# Altium PCB PCB.PcbDoc
Units mm, origin at the board's own origin, x right, y up, seen from the top; angles counter-clockwise.
Board outline 80 x 80 mm, 2 copper layers (Top Layer, Bottom Layer); 23 components, 27 nets, 83 pads, 0 vias.
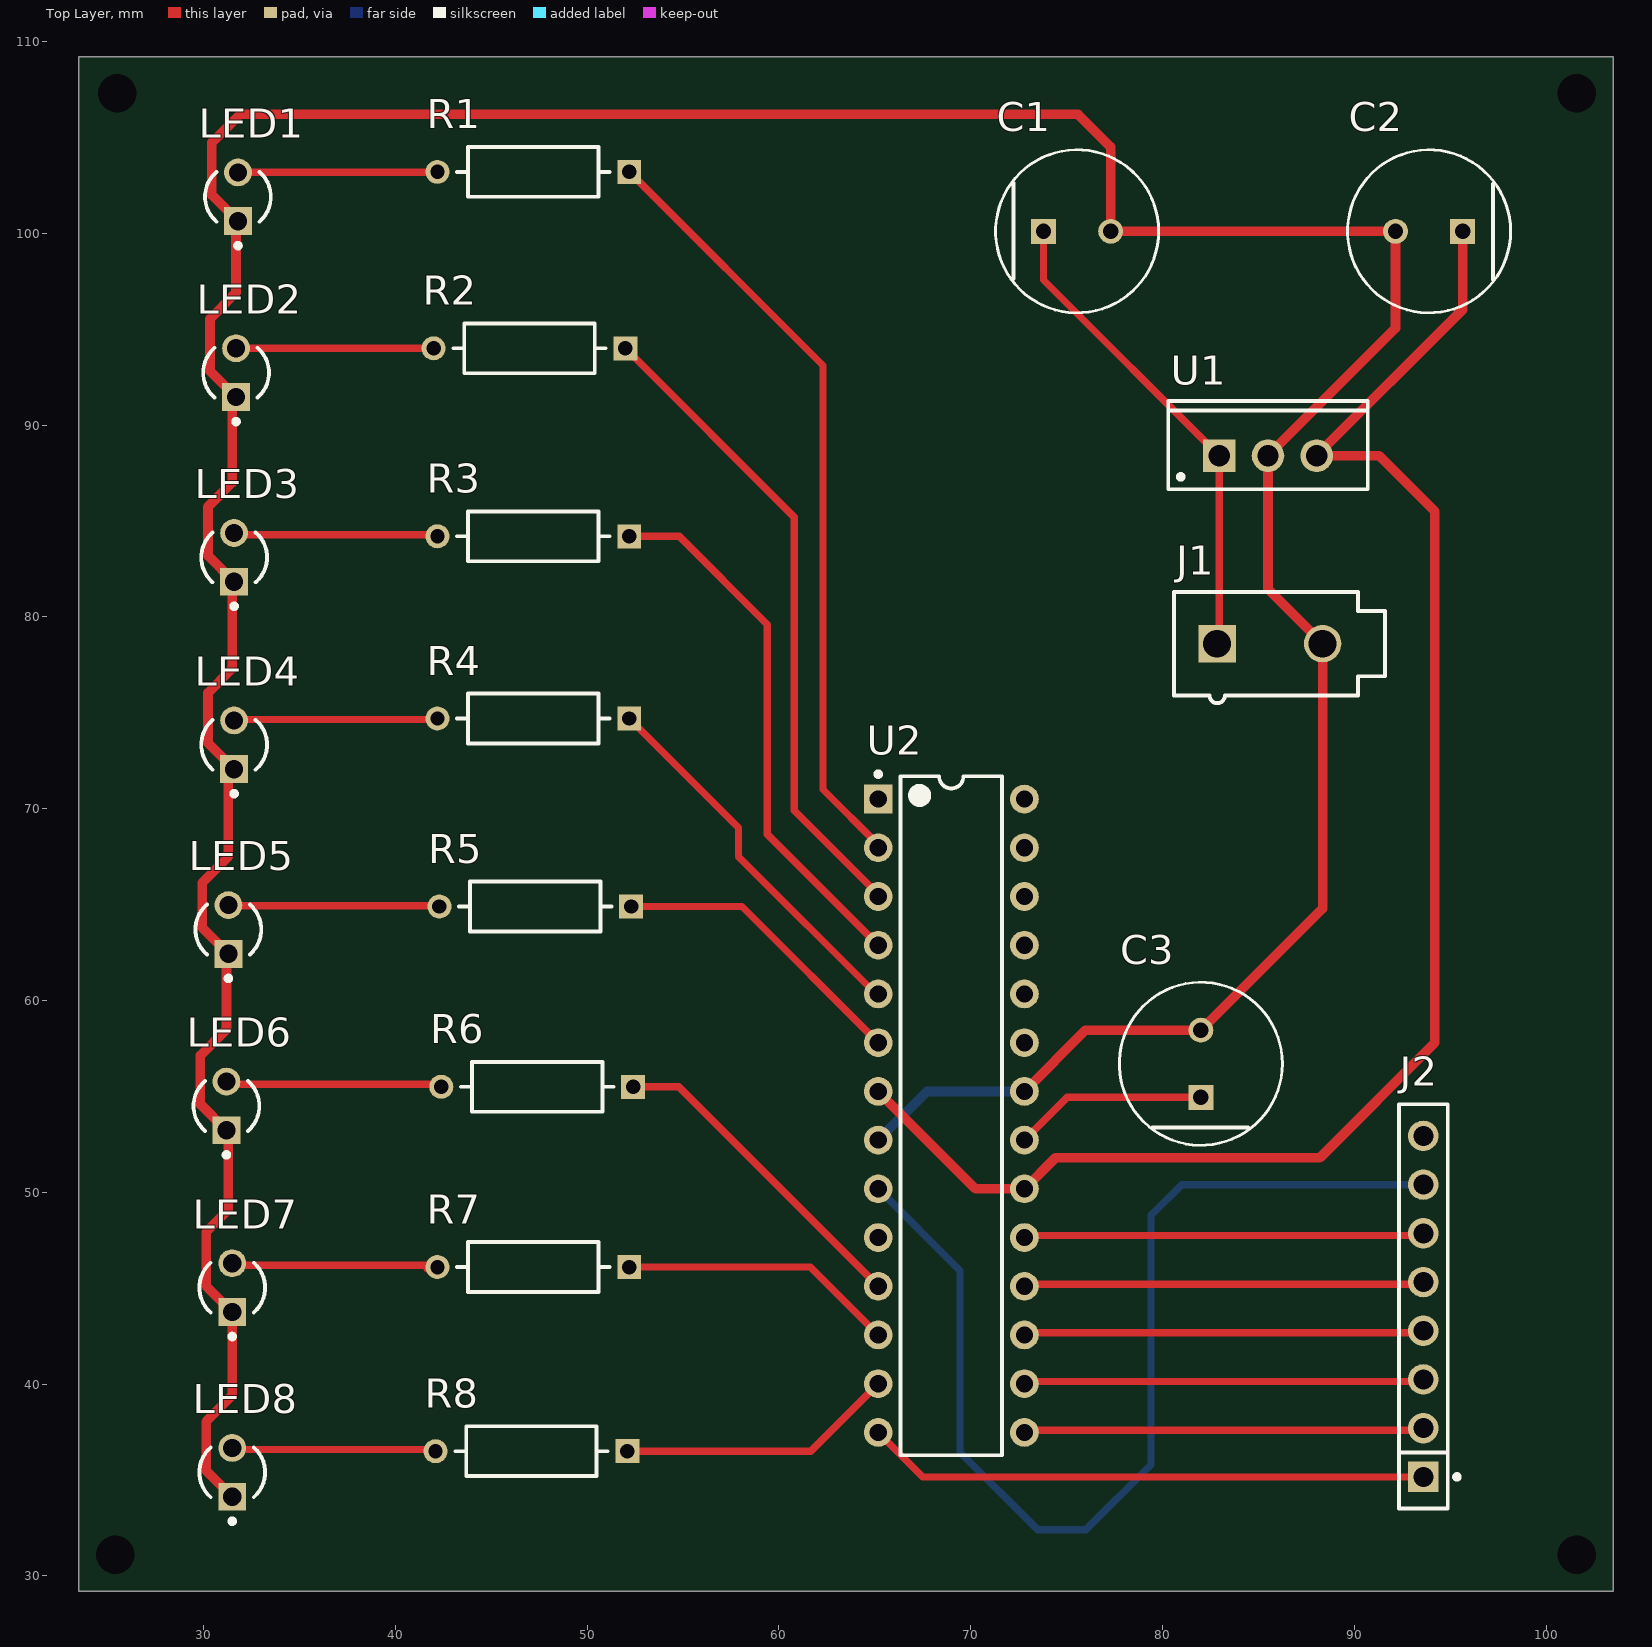
[diagram p0: Top Layer view]
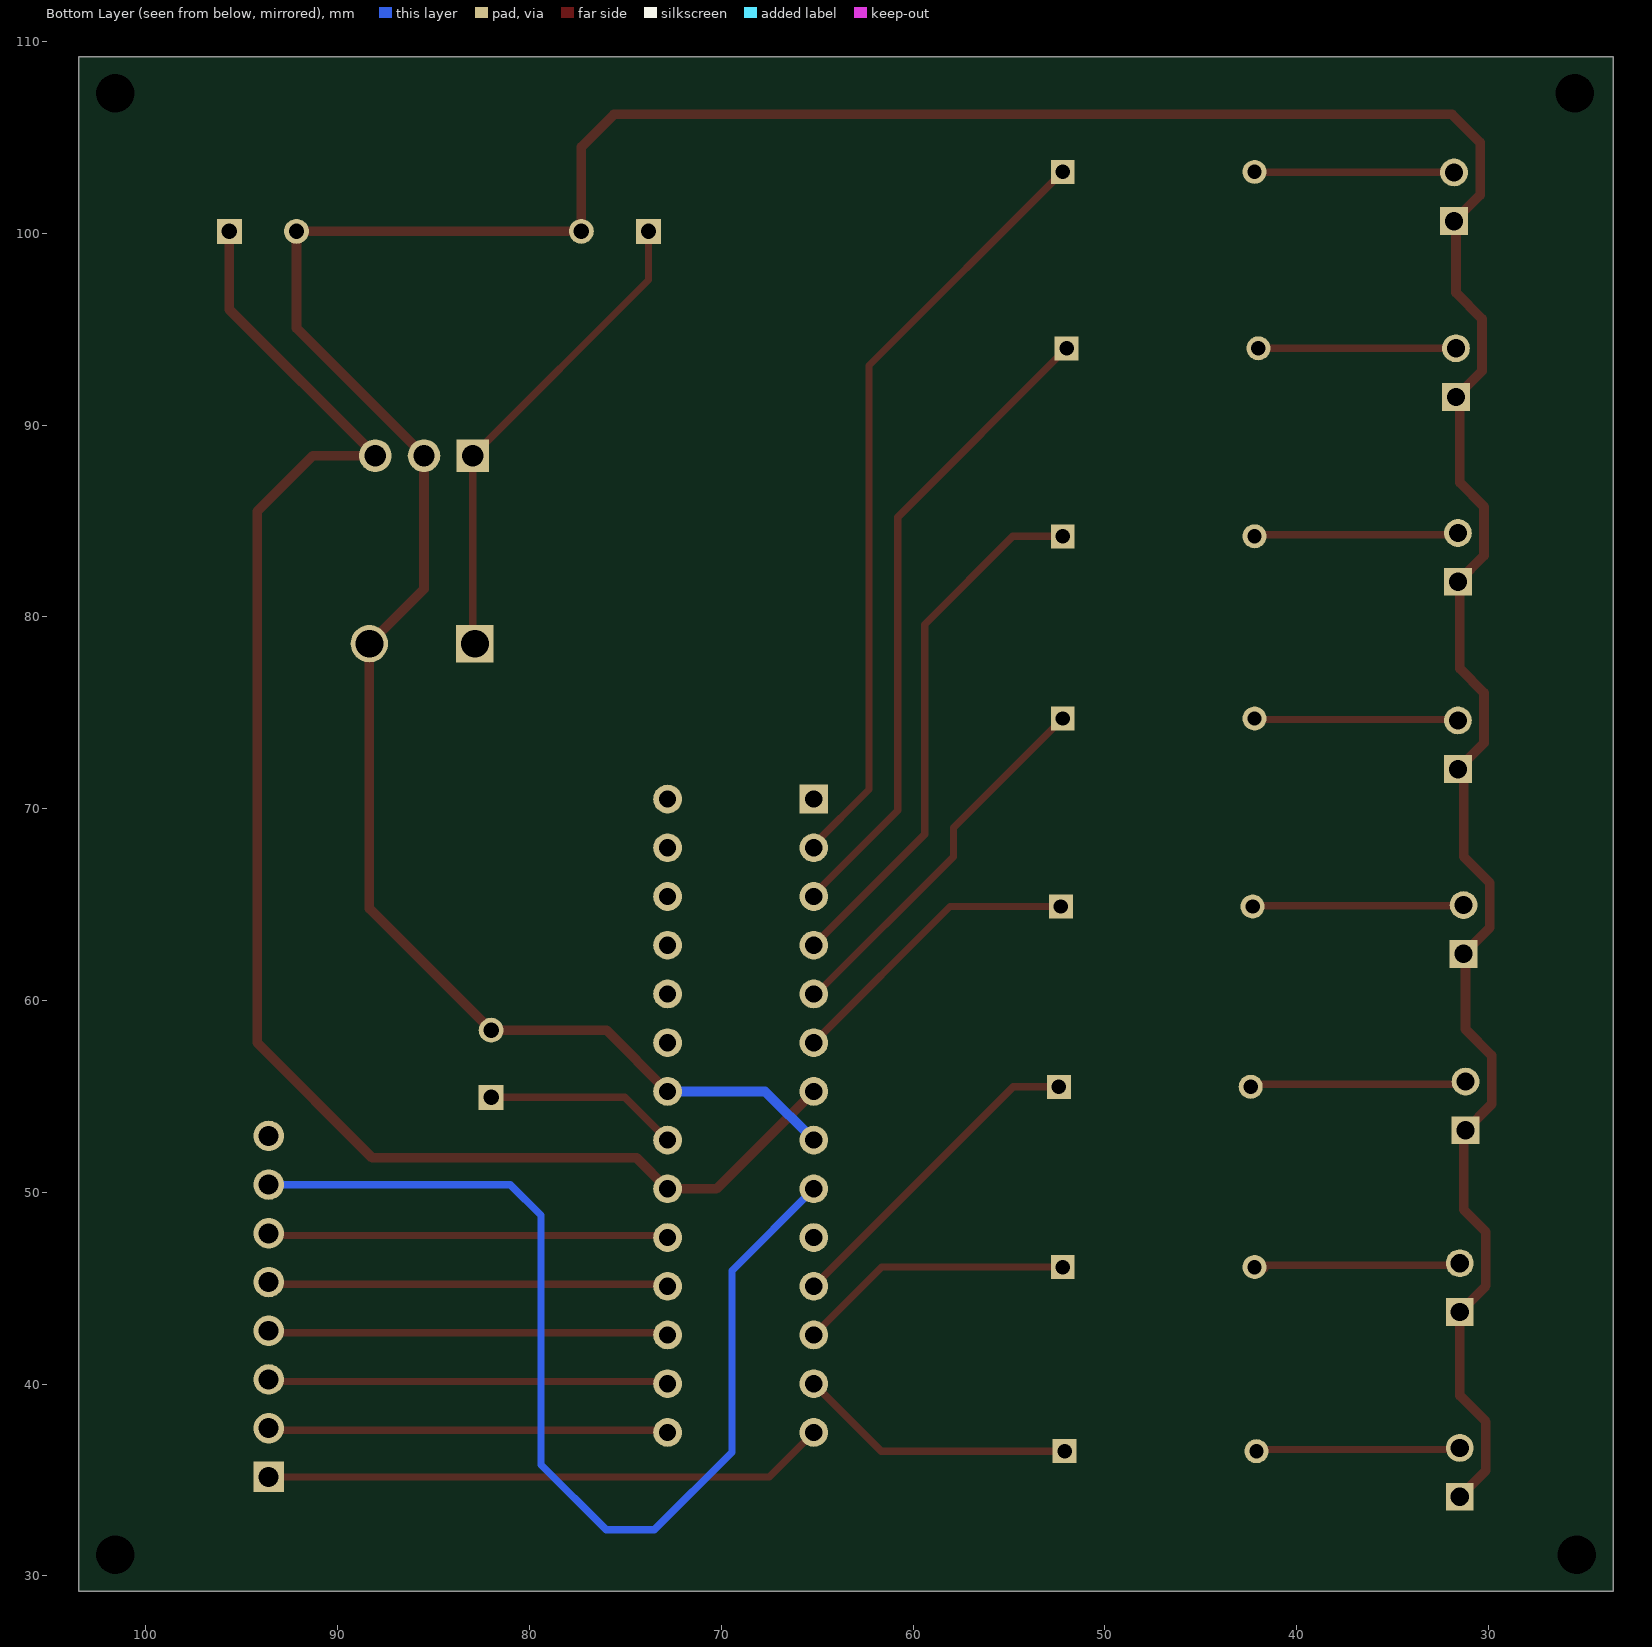
[diagram p1: Bottom Layer view, seen from below]
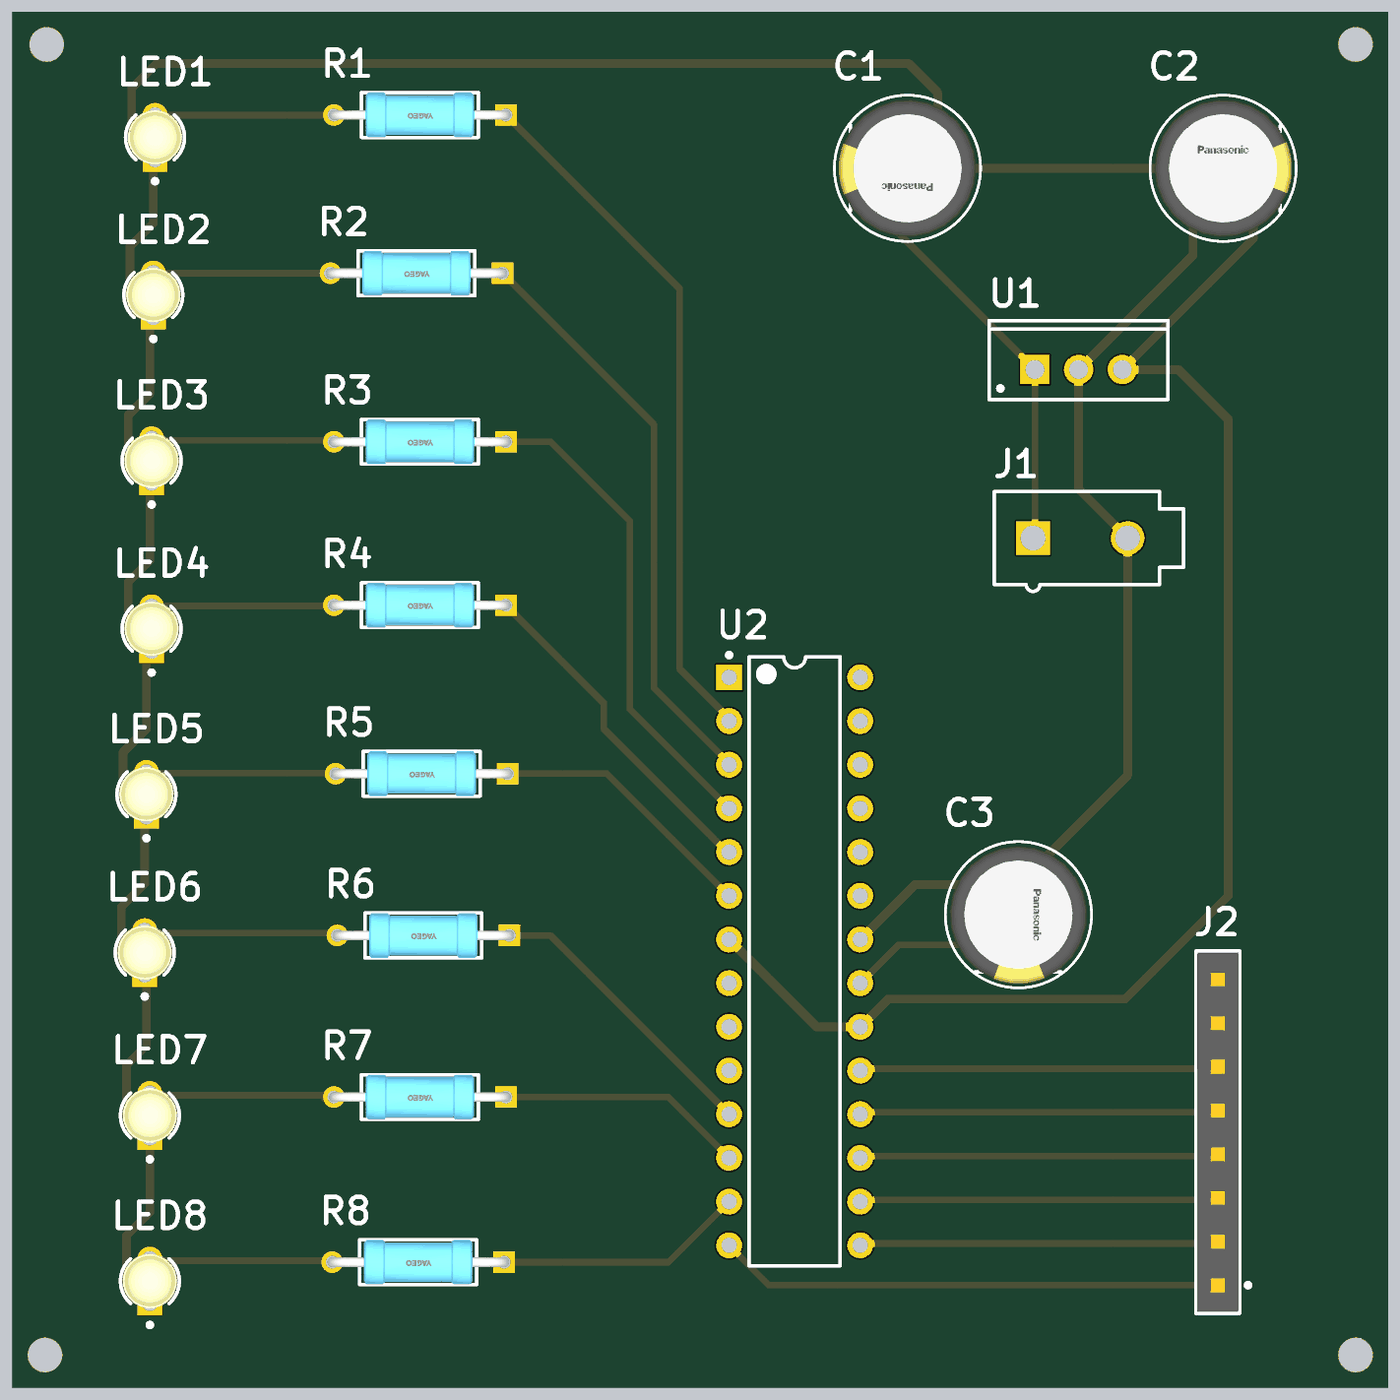
[diagram p2: 3D render of the assembled board from above, using the file's embedded part models]

## Layer stack, top to bottom
Top Solder: solder mask 0.0102, Solder Resist, Dk 3.5
Top Layer: signal copper 0.0356
Dielectric 1: dielectric 0.32, FR-4, Dk 4.8
Bottom Layer: signal copper 0.0356
Bottom Solder: solder mask 0.0102, Solder Resist, Dk 3.5

## Board outline
23.5,29.2 103.5,29.2 103.5,109.2 23.5,109.2

## Design rules (kind name [scope] priority, off if disabled: settings)
Clearance [All] p1: gap=0.381 ignorepadtopadclearanceinfootprint=FALSE except(0.508: Arc-Hole Track-Hole SMDPad-Hole THPad-Hole Via-Hole Fill-Hole Poly-Hole Region-Hole Text-Hole)
PolygonConnect [All] p1: connectstyle=Relief reliefconductorwidth=0.254 reliefentries=4 polygonreliefangle="90 Angle" airgapwidth=0.254
RoutingVias [All] p1: holewidth=0.711 width=1.27 viastyle="Through Hole" minholewidth=0.711 minwidth=1.27 maxholewidth=0.711 maxwidth=1.27
SolderMaskExpansion [All] p1: expansion=0.102 istentingtop=FALSE
Width Width_1 [InNet('GND') or InNet('5V')] p1: maxlimit=0.635 minlimit=0.381 preferedwidth=0.508
Width [All] p2: maxlimit=0.508 minlimit=0.254 preferedwidth=0.381
30 further rules are at their usual default settings.

## Components (designator, comment, footprint, x,y, rotation, side; value= is the part's Value field where it differs from the comment)
C1 "300nF" FP-EEU-FC1V221L-MFG 75.55,100.1 r0 top value=220uF
C2 "100nF" FP-EEU-FC1V221L-MFG 93.9,100.1 r180 top value=220uF
C3 "100nF" FP-EEU-FC1V221L-MFG 82,56.7 r90 top value=220uF
J1 "39-28-1023" MOLX-39-28-1023-2_V 85.6,78.6 r90 top
J2 "SSW-108-01-G-S" FP-SSW-108-01-G-S-MFG 93.6,44.05 r90 top
LED1 "HLMP-1719" FP-HLMP-1719-MFG 31.8,101.9 r90 top
LED2 "HLMP-1719" FP-HLMP-1719-MFG 31.7,92.73 r90 top
LED3 "HLMP-1719" FP-HLMP-1719-MFG 31.6,83.1 r90 top
LED4 "HLMP-1719" FP-HLMP-1719-MFG 31.6,73.33 r90 top
LED5 "HLMP-1719" FP-HLMP-1719-MFG 31.3,63.7 r90 top
LED6 "HLMP-1719" FP-HLMP-1719-MFG 31.2,54.5 r90 top
LED7 "HLMP-1719" FP-HLMP-1719-MFG 31.5,45.03 r90 top
LED8 "HLMP-1719" FP-HLMP-1719-MFG 31.5,35.4 r90 top
R1 "330" FP-MFR-25-MFG 47.2,103.2 r180 top value=1.18kΩ
R2 "330" FP-MFR-25-MFG 47,94 r180 top value=1.18kΩ
R3 "330" FP-MFR-25-MFG 47.2,84.2 r180 top value=1.18kΩ
R4 "330" FP-MFR-25-MFG 47.2,74.7 r180 top value=1.18kΩ
R5 "330" FP-MFR-25-MFG 47.3,64.9 r180 top value=1.18kΩ
R6 "330" FP-MFR-25-MFG 47.4,55.5 r180 top value=1.18kΩ
R7 "330" FP-MFR-25-MFG 47.2,46.1 r180 top value=1.18kΩ
R8 "330" FP-MFR-25-MFG 47.1,36.5 r180 top value=1.18kΩ
U1 "L7805CV" TO220 85.5,88.4 r0 top
U2 "ATmega328-PU" 28P3 68.99,53.99 r0 top

## Footprints (in the part's own frame and the unit in brackets; to place one, negate y for a bottom-side part, rotate by r counter-clockwise, add the part's x,y. Pads: shape width x height; smd on the part's side, far side on the other; paste and mask are expansions set on the pad)
28P3 [mm] "28-Pin Plastic Dual In-Line Package (PDIP)"
  rect 1.5x1.5 hole 0.9: 1(-3.81,16.51)
  round 1.5 hole 0.9: 2(-3.81,13.97) 3(-3.81,11.43) 4(-3.81,8.89) 5(-3.81,6.35) 6(-3.81,3.81) 7(-3.81,1.27) 8(-3.81,-1.27) 9(-3.81,-3.81) 10(-3.81,-6.35) 11(-3.81,-8.89) 12(-3.81,-11.43) 13(-3.81,-13.97) 14(-3.81,-16.51) 15(3.81,-16.51) 16(3.81,-13.97) 17(3.81,-11.43) 18(3.81,-8.89) 19(3.81,-6.35) 20(3.81,-3.81) 21(3.81,-1.27) 22(3.81,1.27) 23(3.81,3.81) 24(3.81,6.35) 25(3.81,8.89) 26(3.81,11.43) 27(3.81,13.97) 28(3.81,16.51)
  silkscreen extent -3.93,-17.7 2.65,17.93, body extent -3.6,-17.65 3.6,17.65, height 4.58
FP-EEU-FC1V221L-MFG [mm]
  rect 1.3x1.3 hole 0.8 paste-1000 mask+0: 1(-1.75,0)
  round 1.3 hole 0.8 paste-1000 mask+0: 2(1.75,0)
  silkscreen extent -4.25,-4.25 4.25,4.25, body extent -4.35,-4.35 4.35,4.35, height 0.25
FP-HLMP-1719-MFG [mm]
  rect 1.45x1.45 hole 0.95 paste-1000 mask+0: 1(-1.27,0)
  round 1.45 hole 0.95 paste-1000 mask+0: 2(1.27,0)
  silkscreen extent -2.67,-1.71 1.3,1.71, body extent -2.22,-2.22 2.22,2.22, height 0.25
FP-MFR-25-MFG [mm]
  rect 1.25x1.25 hole 0.75 paste-1000 mask+0: 1(-5,0)
  round 1.25 hole 0.75 paste-1000 mask+0: 2(5,0)
  silkscreen extent -3.98,-1.3 3.98,1.3, body extent -5.72,-1.4 5.72,1.4, height 0.25
FP-SSW-108-01-G-S-MFG [mm]
  rect 1.59x1.59 hole 1.04 paste-1000 mask+0: 1(-8.89,0)
  round 1.59 hole 1.04 paste-1000 mask+0: 2(-6.35,0) 3(-3.81,0) 4(-1.27,0) 5(1.27,0) 6(3.81,0) 7(6.35,0) 8(8.89,0)
  silkscreen extent -10.54,-1.88 10.54,1.27, body extent -10.64,-1.37 10.64,1.37, height 0.25
MOLX-39-28-1023-2_V [mm] "THD, 2-Leads, Body 11x5.8mm"
  rect 1.95x1.95 hole 1.45: 1(0,2.75)
  round 1.95 hole 1.45: 2(0,-2.75)
  silkscreen extent -3.1,-6 2.7,5, body extent -3.1,-6 2.7,5, height 13.6
TO220 [mm] "TO, Thru-Hole, Vertical, Heatsink Mounted; 3 In-Line Leads; Pitch 2.54 mm"
  rect 1.7x1.7 hole 1.1: 1(-2.54,0)
  round 1.7 hole 1.1: 2(0,0) 3(2.54,0)
  silkscreen extent -5.2,-1.75 5.2,2.85, body extent -5.25,-1.8 5.25,2.9, height 19.7

## Part data
C1 C2 C3: library part CMP-05427-000010-1, "CAP ALUM 220UF 20% 35V RADIAL", Capacitance=220uF, Leakage Current=77uA, Manufacturer="Panasonic Electronic Components", Manufacturer Part Number=EEU-FC1V221L, Package=0, Ripple Current=730mA, Temperature="-55°C to +105°C", Temperature Range High=+105°C, Temperature Range Low=-55°C, Tolerance=20%, Voltage Rating=35V, Automotive=Yes, Automotive Grade="Grade 2", Category=Cap, ComponentLink2Description=Datasheet, ComponentLink2URL=https://industrial.panasonic.com/cdbs/www-data/pdf/RDF0000/ABA0000C1209.pdf, Device Class L1="Passive Components", Device Class L2=Capacitors, Device Class L3="Aluminum Electrolytic Capacitors", Digikey Description="CAP ALUM 220UF 20% 35V RADIAL", Dissipation Factor=12%, Esr=0.085Ω, Height=16.5mm, Lead Free=Yes, Life=2000Hours, Material=Aluminum, Mouser Description="Capacitor; Aluminum Electrolytic; Fc Radial Elec Cap 220uF 35V", Octopart=https://octopart.com/eeu-fc1v221l-panasonic-39478519, RoHS=TRUE
J1: library part CMP-2000-05244-1, "Female Header, Pitch 4.2 mm, 1 x 2 Position, Height 12.8 mm, Tail Length 3.5 mm, -40 to 105 degC, RoHS", Colour=Clear, Current Rating=13A, Flammability Rating=UL94V-2, Manufacturer=Molex, Voltage Rating V AC=600V, Working Voltage=250V, Connector Body Material=–, Connector Insert Type=Header, Connector Mounting=PCB, Connector Mounting Orientation=PCB, Connector Type=RectangularPower, Contact Gender=–, Contact Material=Brass, Contact Plating=Tin, Contact Termination=Solder, Datasheet URL=https://datasheet.ciiva.com/11746/0900766b80460d9e-11746456.pdf, Datasheet Version="Rev. F, 05/2004", Gender=Header, Lead Spacing=4.2mm, Manufacturer URL=http://www.molex.com/, Mounting Orientation=Straight, Mounting Type=PCBoard, MSL=–, No. of Contacts=4, No. of Poles=2, No. of Rows=1, No. of Ways=2, Pitch Spacing=4.2mm, Series=Mini-FitJr, SVHC=–, Termination Method=Solder
J2: library part CMP-1272-00001-2, "CONN RCPT 8POS 0.1 GOLD PCB", Color=Black, Contact Resistance=10mR, Current Rating=6.9A, Max Operating Temperature=125°C, Max Voltage Rating (AC)=550V, Min Operating Temperature=-55°C, Connector Type=Socket, Contact Material=Bronze, Contact Plating=Gold, Contact Type="Female Socket", Depth=2.41mm, Gender=Receptacle, Housing Color=Black, Housing Material=Polymer, Lead Free="Lead Free", Length=20.83mm, Mating Cycles=100, Max Current Rating=6.9A, Number of Contacts=8, Number of Positions=8, Number of Rows=1, Orientation=Vertical, Packaging=Bulk, Pitch=2.54mm, Radiation Hardening=No, REACH SVHC="No SVHC", RoHS Compliant=Yes, Series=SSW, Termination=Solder, Voltage Rating=550V
LED1 LED2 LED3 LED4 LED5 LED6 LED7 LED8: library part CMP-2000-06410-2, "LED YELLOW DIFFUSED T-1 T/H", Colour=Yellow, Forward Current=2mA, Forward Voltage=1.8V, Manufacturer=Broadcom, Package=0, Power Dissipation=17.5mW, Reverse Voltage=5V, Temperature="-40°C to +100°C", Temperature Range High=+100°C, Temperature Range Low=-40°C, Automotive=No, Category=Diode, ComponentLink2Description=Datasheet, ComponentLink2URL=https://docs.broadcom.com/docs/AV02-1557EN, Device Class L1=Optoelectronics, Device Class L2=LEDs, Device Class L3=unset, Digikey Description="LED YELLOW DIFFUSED T-1 T/H", Lead Free=Yes, Led Orientation=Straight, Luminous Intensity=2.1mcd, Manufacturer Part Number=HLMP-1719, Mouser Description="Standard LEDs - Through Hole Yellow Diffused 585nm 2.1mcd", Octopart=https://octopart.com/hlmp-1719-broadcom-71130405, RoHS=TRUE, Viewing Angle=50°, Wavelength=585nm
R1 R2 R3 R4 R5 R6 R7 R8: library part CMP-03413-000001-1, "RES 1.18K OHM 1/4W 1% AXIAL", Manufacturer=Yageo, Manufacturer Part Number=MFR-25FBF52-1K18, Package=MFR-25, Power Rating=0.25W, Resistance=1.18kΩ, Temperature="-55°C to +155°C", Temperature Coefficient=100ppm/°C, Temperature Range High=+155°C, Temperature Range Low=-55°C, Tolerance=1%, Voltage Rating=250V, Automotive=No, Category=Res, ComponentLink2Description=Datasheet, ComponentLink2URL=https://www.yageo.com/upload/media/product/products/datasheet/lr/Yageo_LR_MFR_1.pdf, Composition="Metal Film", Device Class L1="Passive Components", Device Class L2=Resistors, Device Class L3="Through-Hole Resistors", Digikey Description="RES 1.18K OHM 1/4W 1% AXIAL", Height=2.6mm, Ipc Land Pattern Name=RESAD1000W75L680D260, Lead Free=Yes, Mouser Description="Metal Film Resistors 1.18K OHM 1/4W 1%", Octopart=https://octopart.com/mfr-25fbf52-1k18-yageo-56251681, RoHS=TRUE, Series=MFR
U1: library part CMP-0244-00483-1, "Positive Voltage Regulator, 5V, 3-Pin TO-220", ComponentLink1Description="Manufacturer URL", ComponentLink1URL=http://www.st.com, ComponentLink2Description=Datasheet, ComponentLink2URL=http://www.st.com/internet/com/TECHNICAL_RESOURCES/TECHNICAL_LITERATURE/DATASHEET/CD00000444.pdf, ComponentLink3Description="Package Specification", ComponentLink3URL=http://www.st.com/internet/com/TECHNICAL_RESOURCES/TECHNICAL_LITERATURE/PACKAGE_INFORMATION/CD00004649.pdf, DatasheetVersion=16/11/2011, PackageDescription="TO, Thru-Hole, Vertical, Heatsink Mounted; 3 In-Line Leads; Pitch 2.54 mm", PackageReference=TO220, PackageVersion=ver3.0
U2: library part CMP-0095-00015-2, "8-bit AVR Microcontroller, 32KB Flash, 1KB EEPROM, 2KB SRAM, 28-pin PDIP, Industrial Grade (-40°C to 85°C)", ComponentLink1Description="Manufacturer URL", ComponentLink1URL=http://www.atmel.com/, ComponentLink2Description="ATmega48A/48PA/88A/88PA/168A/168PA/328/328P Datasheet", ComponentLink2URL=http://www.atmel.com/dyn/resources/prod_documents/8271.pdf, ComponentLink3Description="ATmega48A/48PA/88A/88PA/168A/168PA/328/328P Summary", ComponentLink3URL=http://www.atmel.com/dyn/resources/prod_documents/8271S.pdf, DatasheetVersion="revD, May-2011", PackageDescription="28-lead (0.300\"/7.62mm Wide) Plastic Dual Inline Package (PDIP)", PackageReference=28P3, PackageVersion="revB, Sep-2001", RevisionNote="DatasheetVersion updated. URLs added."

## Free pads (board coordinates)
  round 1.524 hole 2: 1(25.5,107.3) 2(101.6,107.3) 3(25.4,31.1) 4(101.6,31.1)

## Nets (pads, with @x,y where several pads share a name; then routed paths per layer and width w, separated by ;. In a path a pad name is that pad's centre, name@x,y a point inside that pad or via, vN(x,y) a via of type N, cw(c..) or ccw(c..) an arc to the next point about the centre after c; other vN are vias at no path point)
5V: C2.1 U1.3 U2.7 U2.20 | length 84.3
  Top Layer w0.508: U2.7 70.26,50.18 U2.20 74.42,51.8 88.2,51.8 94.2,57.8 94.2,85.5 91.3,88.4 U1.3 95.65,96.01 C2.1
  Bottom Layer w0.508: U2.7 65.2,55.28 U2.7@65.2,55.4
GND: C1.2 C2.2 C3.2 J1.2 LED1.1 LED2.1 LED3.1 LED4.1 LED5.1 LED6.1 LED7.1 LED8.1 U1.2 U2.8 U2.22 | length 214
  Top Layer w0.508: LED8.1 30.14,35.49 30.14,38.04 31.5,39.4 LED7.1 30.14,45.12 30.14,47.94 31.3,49.1 31.3,53.13 LED6.1 29.84,54.59 29.84,57.14 31.2,58.5 31.2,62.33 LED5.1 29.94,63.79 29.94,66.14 31.3,67.5 31.3,71.76 LED4.1 30.24,73.42 30.24,76.04 31.5,77.3 31.5,81.73 LED3.1 30.24,83.19 30.24,85.74 31.5,87 31.5,91.26 LED2.1 30.34,92.82 30.34,95.54 31.7,96.9 LED1.1@31.7,100.53 ; LED1.1 30.44,101.99 30.44,104.74 31.9,106.2 75.6,106.2 77.3,104.5 C1.2 C2.2 92.15,95.05 U1.2 85.5,81.45 J1.2 88.35,64.8 C3.2 75.99,58.45 U2.22
  Bottom Layer w0.508: U2.8 67.72,55.26 U2.22
NetC3_1: C3.1 U2.21 | length 10.1
  Top Layer w0.381: U2.21 75.03,54.95 C3.1
NetJ2_1: J2.1 U2.14 | length 29.4
  Top Layer w0.381: U2.14 67.5,35.16 J2.1
NetJ2_2: J2.2 U2.15 | length 20.9
  Top Layer w0.381: U2.15 72.91,37.59 93.49,37.59 J2.2
NetJ2_3: J2.3 U2.16 | length 20.9
  Top Layer w0.381: U2.16 72.91,40.13 93.49,40.13 J2.3
NetJ2_4: J2.4 U2.17 | length 20.9
  Top Layer w0.381: U2.17 72.91,42.67 93.49,42.67 J2.4
NetJ2_5: J2.5 U2.18 | length 20.9
  Top Layer w0.381: U2.18 72.91,45.21 93.49,45.21 J2.5
NetJ2_6: J2.6 U2.19 | length 20.9
  Top Layer w0.381: U2.19 72.91,47.75 93.49,47.75 J2.6
NetJ2_7: J2.7 U2.9 | length 56.4
  Bottom Layer w0.381: U2.9 69.447,45.913 69.447,36.453 73.5,32.4 76,32.4 79.4,35.8 79.4,48.8 81,50.4 J2.7
NetLED1_2: LED1.2 R1.2 | length 10.5
  Top Layer w0.381: LED1.2@31.815,103.185 42.185,103.185 R1.2 R1.2@42.15,103.25
NetLED2_2: LED2.2 R2.2 | length 10.4
  Top Layer w0.381: LED2.2 R2.2 R2.2@41.9,93.9
NetLED3_2: LED3.2 R3.2 | length 10.9
  Top Layer w0.254: R3.2@42.073,84.073 R3.2
  Top Layer w0.381: LED3.2@31.6,84.3 LED3.2 31.685,84.285 42.115,84.285 R3.2
NetLED4_2: LED4.2 R4.2 | length 10.6
  Top Layer w0.381: LED4.2 31.65,74.65 42.15,74.65 R4.2
NetLED5_2: LED5.2 R5.2 | length 11.1
  Top Layer w0.381: LED5.2 31.335,64.935 42.265,64.935 R5.2 R5.2@42.25,64.85
NetLED6_2: LED6.2 R6.2 | length 11.3
  Top Layer w0.381: LED6.2 31.335,55.635 42.265,55.635 R6.2
NetLED7_2: LED7.2 R7.2 | length 12.3
  Top Layer w0.254: R7.2@41.676,46.1 41.776,46.2 42.057,46.481 R7.2@42.327,46.481
  Top Layer w0.381: LED7.2 31.6,46.2 41.776,46.2 R7.2@41.865,46.2 ; R7.2@41.665,46 R7.2@41.865,46.2 ; R7.2 42.1,46.2 R7.2@41.865,46.2 ; R7.2@42.2,46.3 41.965,46.3 R7.2@41.865,46.2
NetLED8_2: LED8.2 R8.2 | length 10.7
  Top Layer w0.381: LED8.2 31.585,36.585 42.015,36.585 R8.2
NetR1_1: R1.1 U2.2 | length 40.6
  Top Layer w0.381: R1.1 62.3,93.1 62.3,71 65.18,68.12 U2.2
NetR2_1: R2.1 U2.3 | length 34
  Top Layer w0.381: R2.1 60.8,85.2 60.8,69.9 65.18,65.52 U2.3
NetR3_1: R3.1 U2.4 | length 28.2
  Top Layer w0.381: R3.1 54.8,84.2 59.4,79.6 59.4,68.66 U2.4
NetR4_1: R4.1 U2.5 | length 19.8
  Top Layer w0.381: R4.1 57.9,69 57.9,67.5 65.06,60.34 U2.5
NetR5_1: R5.1 U2.6 | length 15.8
  Top Layer w0.381: R5.1 58.08,64.9 U2.6
NetR6_1: R6.1 U2.11 | length 17.1
  Top Layer w0.381: R6.1 54.78,55.5 U2.11
NetR7_1: R7.1 U2.12 | length 14.4
  Top Layer w0.381: R7.1 61.64,46.1 U2.12
NetR8_1: R8.1 U2.13 | length 14.5
  Top Layer w0.381: R8.1 61.66,36.5 U2.13
VCC: C1.1 J1.1 U1.1 | length 25.3
  Top Layer w0.381: C1.1 73.8,97.56 U1.1 82.96,78.71 J1.1
pads on no net: J2.8 U2.1 U2.10 U2.23 U2.24 U2.25 U2.26 U2.27 U2.28